# Altium PCB PCB1.PcbDoc
Units mil, origin at the board's own origin, x right, y up, seen from the top; angles counter-clockwise.
Board outline 2318.9 x 2507.87 mil, 2 copper layers (Top Layer, Bottom Layer); 19 components, 36 nets, 134 pads, 1 vias.
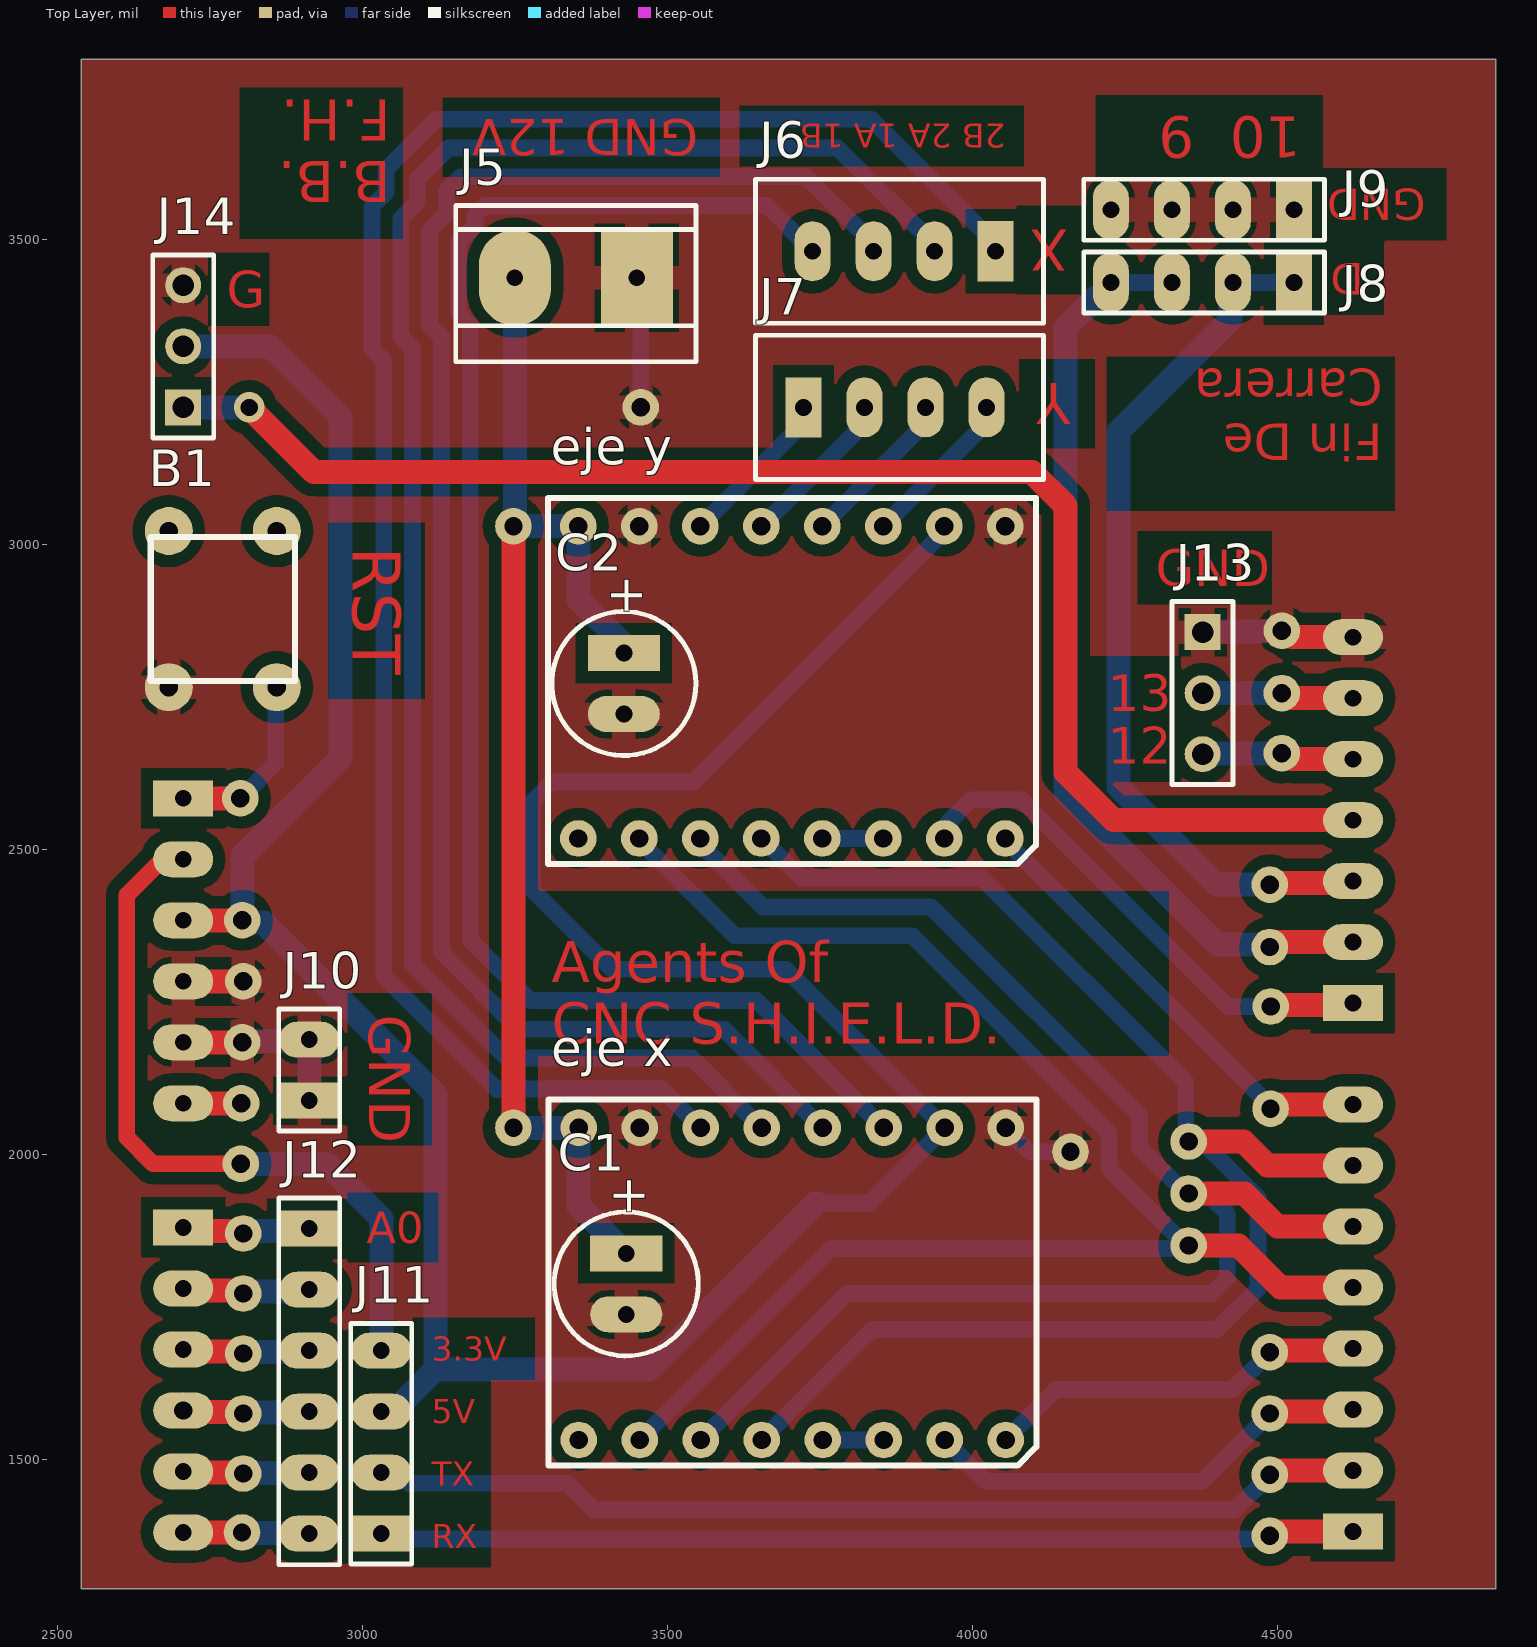
[diagram p0: Top Layer view]
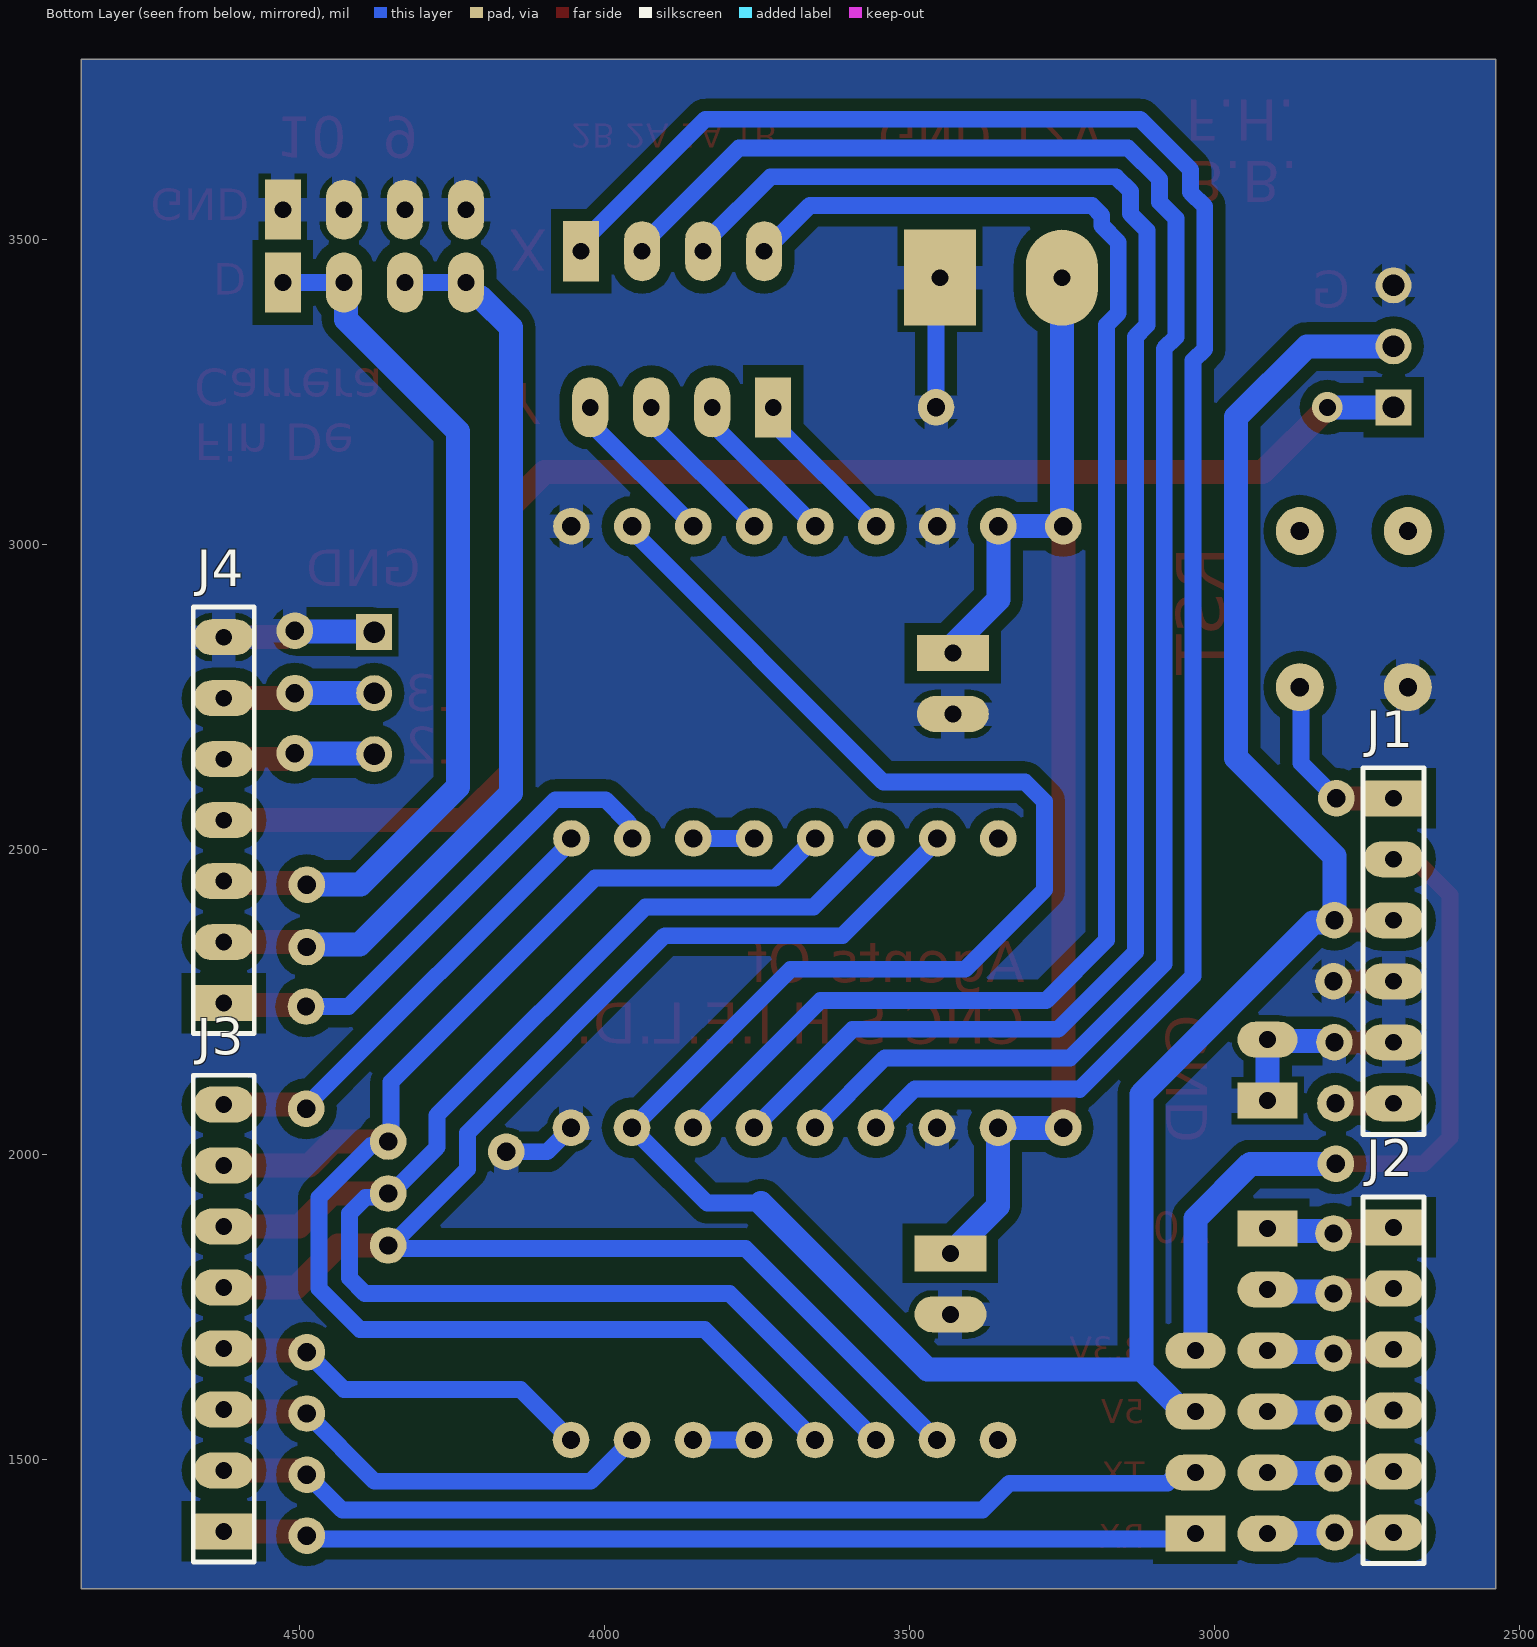
[diagram p1: Bottom Layer view, seen from below]

## Layer stack, top to bottom
Top Solder: solder mask 0.4, Solder Resist, Dk 3.5
Top Layer: signal copper 1.4
Dielectric 1: dielectric 12.6, FR-4, Dk 4.8
Bottom Layer: signal copper 1.4
Bottom Solder: solder mask 0.4, Solder Resist, Dk 3.5

## Board outline
2539.37,1287.4 2539.37,3795.28 4858.27,3795.28 4858.27,1287.4

## Design rules (kind name [scope] priority, off if disabled: settings)
Clearance [All] p1: gap=19.68 ignorepadtopadclearanceinfootprint=FALSE
PolygonConnect [All] p1: connectstyle=Relief reliefconductorwidth=39.37 reliefentries=4 polygonreliefangle="90 Angle" airgapwidth=10
RoutingVias [All] p1: holewidth=28 width=50 viastyle="Through Hole" minholewidth=28 minwidth=50 maxholewidth=28 maxwidth=50
SolderMaskExpansion [All] p1: expansion=4 istentingtop=FALSE
Width [All] p1: maxlimit=39.37 minlimit=10 preferedwidth=39.37
30 further rules are at their usual default settings.

## Classes and differential pairs
component class Sheet1: B1 C1 C2 "eje x" "eje y" J1 J2 J3 J4 J5 J6 J7 J8 J9 J10 J11 J12 J14

## Components (designator, comment, footprint, x,y, rotation, side; value= is the part's Value field where it differs from the comment)
B1 "Pulsador 4 patas" Pulsador4patas 2771.65,2893.7 r270 top
C1 "Cap 100uF" "Cap 100uF 50V" 3433.07,1787.4 r90 top
C2 "Cap 100uF" "Cap 100uF 50V" 3429.13,2771.65 r90 top
"eje x" "driver A4988" "DRIVER A4988" 3705.32,1789.37 r90 top
"eje y" "driver A4988" "DRIVER A4988" 3704.72,2775.59 r90 top
J1 "1" HDR1X6 2706.69,2583.46 r270 bottom
J2 "1" HDR1X6 2706.69,1879.92 r270 bottom
J3 "1" HDR1X8 4624.41,1381.5 r90 bottom
J4 "1" HDR1X7 4624.41,2247.64 r90 bottom
J5 "VMOT" Bornerax2 3350.39,3437.01 r180 top
J6 "Header 4 blanquito" "HDR1X4 blanquito" 4077.95,3480.31 r180 top
J7 "Header 4 blanquito" "HDR1X4 blanquito" 3684.25,3224.41 r0 top
J8 "FIN DE CARRERA" HDR1X4 4527.56,3429.13 r180 top
J9 "GND" HDR1X4 4527.56,3548.43 r180 top
J10 "GND" HDR1X2 2913.39,2137.8 r90 top
J11 "Header 4" HDR1X4 3031.5,1377.95 r90 top
J12 "ANALOGICOS" HDR1X6 2913.39,1877.95 r270 top
J13 "Header 3" HDR1X3 4377.95,2855.91 r270 top
J14 "Header 3" HDR1X3 2706.69,3224.41 r90 top

## Footprints (in the part's own frame and the unit in brackets; to place one, negate y for a bottom-side part, rotate by r counter-clockwise, add the part's x,y. Pads: shape width x height; smd on the part's side, far side on the other; paste and mask are expansions set on the pad)
Bornerax2 [mm] "Connector; Header; 2 Position"
  rect 3x4 hole 0.7: 1(-2.54,0)
  oval 3x4 hole 0.7: 2(2.54,0)
  silkscreen extent -5,-3 5,3.5
"Cap 100uF 50V" [mm] "Polarized Capacitor (Radial); 2 Leads"
  rect 1.5x3 hole 0.7: 1(1.27,0)
  oval 1.5x3 hole 0.7: 2(-1.27,0)
  silkscreen extent -3,-3 3,3
"DRIVER A4988" [mil]
  round 60 hole 30: 0(253.94,350.2) 1(253.94,250.2) 2(253.94,150.2) 3(253.94,50.2) 4(253.94,-49.8) 5(253.94,-149.8) 6(253.94,-249.8) 7(253.94,-349.8) 8(-257.87,350.2) 9(-257.87,250.2) 10(-257.87,150.2) 11(-257.87,50.2) 12(-257.87,-49.8) 13(-257.87,-149.8) 14(-257.87,-249.8) 15(-257.87,-349.8)
  silkscreen extent -300,-400 300,400
HDR1X2 [mm] "Connector; Header; 2 Position"
  rect 1.5x2.5 hole 0.7: 1(-1.27,0)
  oval 1.5x2.5 hole 0.7: 2(1.27,0)
  silkscreen extent -2.54,-1.27 2.54,1.27
HDR1X3 [mm] "Connector; Header; 3 Position"
  rect 1.5x1.5 hole 0.9: 1(0,0)
  round 1.5 hole 0.9: 2(2.54,0) 3(5.08,0)
  silkscreen extent -1.27,-1.27 6.35,1.27
HDR1X4 [mm] "Connector; Header; 9 Position"
  rect 1.5x2.5 hole 0.7: 1(0,0)
  oval 1.5x2.5 hole 0.7: 2(2.54,0) 3(5.08,0) 4(7.62,0)
  silkscreen extent -1.27,-1.27 8.75,1.27
"HDR1X4 blanquito" [mm] "Connector; Header; 9 Position"
  rect 1.5x2.5 hole 0.7: 1(1,0)
  oval 1.5x2.5 hole 0.7: 2(3.54,0) 3(6.08,0) 4(8.62,0)
  silkscreen extent -1,-3 11,3
HDR1X6 [mm] "Connector; Header; 9 Position"
  rect 1.5x2.5 hole 0.7: 1(0,0)
  oval 1.5x2.5 hole 0.7: 2(2.54,0) 3(5.08,0) 4(7.62,0) 5(10.16,0) 6(12.7,0)
  silkscreen extent -1.27,-1.27 14,1.27
HDR1X7 [mm] "Connector; Header; 9 Position"
  rect 1.5x2.5 hole 0.7: 1(0,0)
  oval 1.5x2.5 hole 0.7: 2(2.54,0) 3(5.08,0) 4(7.62,0) 5(10.16,0) 6(12.7,0) 7(15.24,0)
  silkscreen extent -1.27,-1.27 16.5,1.27
HDR1X8 [mm] "Connector; Header; 9 Position"
  rect 1.5x2.5 hole 0.7: 1(0,0)
  oval 1.5x2.5 hole 0.7: 2(2.54,0) 3(5.08,0) 4(7.62,0) 5(10.16,0) 6(12.7,0) 7(15.24,0) 8(17.78,0)
  silkscreen extent -1.27,-1.27 19,1.27
Pulsador4patas [mm]
  round 2 hole 0.762: 0(-3.25,2.25) 1(3.25,2.25) 2(3.25,-2.25) 3(-3.25,-2.25)
  silkscreen extent -3,-3 3,3

## Part data
C1 C2: library part "Cap 100uF 50V", "Polarized Capacitor (Radial)", LatestRevisionDate=17-Jul-2002, LatestRevisionNote="Re-released for DXP Platform.", PackageDescription="Polarized Capacitor (Radial); 2 Leads", PackageReference=RB7.6-15, Published=8-Jun-2000, Publisher="Altium Limited"
J1 J2 J12: library part "header X6"
J3: library part "header X8"
J4: library part "header X7"
J5: library part Bornerax2, "Header, 2-Pin", LatestRevisionDate=17-Jul-2002, LatestRevisionNote="Re-released for DXP Platform.", Publisher="Altium Limited"
J6 J7: library part "Header 4_1", "Header, 2-Pin", LatestRevisionDate=17-Jul-2002, LatestRevisionNote="Re-released for DXP Platform.", Publisher="Altium Limited"
J8 J9: library part "Header 4", "Header, 2-Pin", LatestRevisionDate=17-Jul-2002, LatestRevisionNote="Re-released for DXP Platform.", Publisher="Altium Limited"
J10: library part "Header 2", "Header, 2-Pin", LatestRevisionDate=17-Jul-2002, LatestRevisionNote="Re-released for DXP Platform.", Publisher="Altium Limited"
J11: "Header, 2-Pin", LatestRevisionDate=17-Jul-2002, LatestRevisionNote="Re-released for DXP Platform.", Publisher="Altium Limited"
J13 J14: "Header, 3-Pin", LatestRevisionDate=17-Jul-2002, LatestRevisionNote="Re-released for DXP Platform.", Publisher="Altium Limited"

## Free pads (board coordinates)
  round 60 hole 30: 5(2805.12,1673.23) 6(2805.12,1771.65) 7(2805.12,1870.08) 8(2805.12,1476.38) 10(2706.69,1579.92) 11(2805.12,1574.8) 12(2803.15,1379.92) 13(2800.39,2583.46) 14(2801.18,1984.25) 15(2803.54,2383.46) 16(2805.12,2283.46) 17(2803.54,2183.46) 18(2801.97,2083.46) 19(4488.19,1374.61) 20(4488.19,1474.41) 21(4488.19,1574.8) 22(4488.19,1675.2) 23(4355.01,1850.39) 24(4355.01,1935.53) 25(4355.01,2020.67) 26(4489.37,2074.61) 27(4489.57,2242.13) 28(4488.19,2339.57) 29(4488.19,2441.93) 31(4507.87,2657.48) 32(4507.87,2755.91) 33(4507.87,2858.27) 35(3248.03,2043.31) 36(3248.03,3029.53) 37(4161.42,2003.94) 38(3456.69,3224.41)

## Via types
v1: diameter 50, hole 28, Top Layer to Bottom Layer, 1 vias

## Nets (pads, with @x,y where several pads share a name; then routed paths per layer and width w, separated by ;. In a path a pad name is that pad's centre, name@x,y a point inside that pad or via, vN(x,y) a via of type N, cw(c..) or ccw(c..) an arc to the next point about the centre after c; other vN are vias at no path point)
1A_X: "eje x.4" J6.3 | length 2756.3
  Bottom Layer w27.56: 3755.12,2043.31 3593.7,2204.72 3256.47,2204.72 3129.92,2331.28 3129.92,3340.14 3110.63,3359.43 3110.63,3514.58 3137.8,3541.75 3137.8,3578.74 3161.42,3602.36 3728.35,3602.36 J6.3@3830.71,3500
1A_Y: "eje y.4" J7.3 | length 253
  Bottom Layer w27.56: 3765.75,3029.53 3754.53,3029.53 J7.3@3925.49,3200.49
1B_X: "eje x.5" J6.4 | length 2603.9
  Bottom Layer w27.56: J6.4 3663.78,3555.12 3201.18,3555.12 3185.04,3538.97 3185.04,3522.18 3157.87,3495.02 3157.87,3379 3177.17,3359.71 3177.17,2350.84 3276.04,2251.97 3646.46,2251.97 3855.12,2043.31
1B_Y: "eje y.5" J7.4 | length 258.8
  Bottom Layer w27.56: 3864.17,3029.53 3854.53,3029.53 4023.62,3198.62 J7.4@4023.62,3208.66
2A_X: "eje x.3" J6.2 | length 2931.9
  Bottom Layer w27.56: 3655.12,2043.31 3540.95,2157.48 3236.9,2157.48 3082.68,2311.71 3082.68,3320.57 3063.39,3339.86 3063.39,3534.15 3090.55,3561.32 3090.55,3598.43 3141.73,3649.61 3779.53,3649.61 J6.2@3943.7,3485.43
2A_Y: "eje y.3" J7.2 | length 232
  Bottom Layer w27.56: 3654.53,3029.53 3655.51,3029.53 J7.2@3818.9,3192.91
2B_X: "eje x.2" J6.1 | length 3053.9
  Bottom Layer w27.56: 3555.12,2043.31 3491.65,2106.77 3221.74,2106.77 3221.27,2106.3 3035.43,2292.14 3035.43,3301 3016.14,3320.29 3016.14,3553.72 3039.37,3576.95 3039.37,3614.06 3122.16,3696.85 3834.65,3696.85 J6.1@4019.68,3511.81
2B_Y: "eje y.2" J7.1 | length 258.3
  Bottom Layer w27.56: 3557.09,3029.53 3554.53,3029.53 3720.47,3195.47 J7.1@3720.47,3216.54
3.3V: J1.2 J11.4 pad.14 | length 1203.1
  Top Layer w27.56: J1.2 2672.44,2483.46 2614.17,2425.2 2614.17,2027.56 2657.48,1984.25 pad.14
  Bottom Layer w39.37: pad.14 2941.5,1984.25 3031.5,1894.26 J11.4
5V: "eje x.6" "eje y.6" J1.3 J11.3 J14.2 pad.15 | length 5146.5
  Top Layer w39.37: J1.3 pad.15
  Bottom Layer w27.56: 3743.75,1920.12 3831.94,1920.12 3955.12,2043.31 3695.28,2303.15 3409.45,2303.15 3279.13,2433.47 3279.13,2578.34 3311.02,2610.24 3543.31,2610.24 3954.53,3021.46 3954.53,3029.53
  Bottom Layer w39.37: J14.2 2848.82,3324.41 2964.57,3208.66 2964.57,2649.53 2803.54,2488.51 pad.15 2807.49,2379.52 2838.78,2379.52 3120.08,2098.22 3120.08,1646.85 ; J11.3 3051.18,1577.95 3120.08,1646.85 ; 3743.75,1920.12 3470.47,1646.85 3120.08,1646.85
12V: "eje x.0" "eje y.0" C1.1 C2.1 J5.2 pad.35 pad.36 | length 2087.6
  Top Layer w39.37: pad.35 pad.36
  Bottom Layer w27.56: pad.36 pad.36@3250.39,3031.89 ; C2.1 C2.1@3429.13,2834.65
  Bottom Layer w39.37: pad.35 3355.12,2043.31 3355.12,1915.35 C1.1 ; pad.36 pad.36@3250.39,3029.53 ; J5.2 3250.39,3031.89 pad.36@3250.39,3029.53 ; C2.1@3429.13,2834.65 3354.53,2909.25 3354.53,3029.53 pad.36@3250.39,3029.53
A0: J2.1 J12.1 pad.7 | length 214
  Top Layer w39.37: J2.1 2712.59,1874.03 2801.17,1874.03 pad.7
  Bottom Layer w39.37: pad.7 2809.06,1874.02 2909.45,1874.02 J12.1
A1: J2.2 J12.2 pad.6 | length 224.4
  Top Layer w27.56: pad.6@2796.85,1779.92 pad.6
  Top Layer w39.37: J2.2 2710.46,1776.15 2795.03,1776.15 2799.54,1771.65 pad.6
  Bottom Layer w39.37: pad.6 2808.27,1774.8 2910.24,1774.8 J12.2
A2: J2.3 J12.3 pad.5 | length 211.4
  Top Layer w39.37: J2.3 2710.04,1676.57 2801.77,1676.57 pad.5
  Bottom Layer w39.37: pad.5 2807.48,1675.59 2911.02,1675.59 J12.3
A3: J2.4 J12.4 pad.10 pad.11 | length 210.1
  Top Layer w39.37: pad.10 2709.25,1577.36 2802.56,1577.36 pad.11
  Bottom Layer w39.37: pad.11 2806.69,1576.38 2911.81,1576.38 J12.4
A4: J2.5 J12.5 pad.8 | length 208.8
  Top Layer w39.37: J2.5 2708.46,1478.15 2803.35,1478.15 pad.8
  Bottom Layer w39.37: pad.8 2805.91,1477.17 2912.6,1477.17 J12.5
A5: J2.6 J12.6 pad.12 | length 207.5
  Top Layer w39.37: J2.6 pad.12
  Bottom Layer w39.37: pad.12 2804.13,1378.94 2912.4,1378.94 J12.6
D0: J3.1 J11.1 pad.19 | length 1611.3
  Top Layer w27.56: pad.19 pad.19@4491.63,1378.05 ; J3.1@4620.96,1378.05 J3.1
  Top Layer w39.37: pad.19 4493.77,1374.61 4500.66,1381.5 J3.1
  Bottom Layer w27.56: J11.1 3040.16,1369.29 4482.87,1369.29 pad.19
D1: J3.2 J11.2 pad.20 | length 1655.3
  Top Layer w27.56: pad.20 pad.20@4491.73,1477.95 ; J3.2@4620.87,1477.95 J3.2
  Top Layer w39.37: pad.20 4493.77,1474.41 4500.86,1481.5 J3.2
  Bottom Layer w27.56: J11.2 3059.7,1477.95 3077.03,1460.63 3336.23,1460.63 3380.33,1416.54 4430.32,1416.54 pad.20
D2: "eje x.14" J3.3 pad.21 | length 746.1
  Top Layer w39.37: pad.21 4491.54,1578.15 4621.06,1578.15 J3.3
  Bottom Layer w27.56: 3955.12,1531.5 4022.83,1463.78 4377.17,1463.78 pad.21
D3: "eje x.15" J3.4 pad.22 | length 631.4
  Top Layer w39.37: pad.22 4491.34,1678.35 4621.26,1678.35 J3.4
  Bottom Layer w27.56: 4055.12,1531.5 4137.8,1614.17 4427.17,1614.17 pad.22
D4: "eje x.9" "eje y.9" J3.5 pad.23 | length 2510.7
  Top Layer w39.37: pad.23 4437.01,1850.39 4505.91,1781.5 J3.5
  Bottom Layer w27.56: 3455.12,1531.5 3769.09,1845.47 pad.23@4350.39,1845.47 ; 3470.47,2498.03 3610.24,2358.27 3901.57,2358.27 4224.88,2034.96 4224.88,1975.91 4350.39,1850.39 pad.23
D5: "eje x.10" "eje y.10" J3.6 pad.24 | length 2523.2
  Top Layer w39.37: pad.24 4446.82,1935.53 4500.86,1881.5 J3.6
  Bottom Layer w27.56: 3554.53,2517.72 3554.53,2508.47 3657.48,2405.51 3933.07,2405.51 4274.69,2063.89 4274.69,2011.24 4350.39,1935.53 pad.24 ; 3555.12,1531.5 3795.28,1771.65 4393.31,1771.65 4418.47,1796.82 4418.47,1902.89 4392.04,1929.32 pad.24@4355.2,1929.32
D6: "eje x.11" "eje y.11" J3.7 pad.25 | length 2459.3
  Top Layer w27.56: J3.7@4623.13,1982.78 J3.7
  Top Layer w39.37: pad.25 4445.2,2020.67 4484.38,1981.5 J3.7
  Bottom Layer w27.56: 3655.12,1531.5 3836.22,1712.6 4401.06,1712.6 4468.5,1780.04 4468.5,1929.13 4383.18,2014.46 4361.22,2014.46 pad.25 ; 3657.48,2515.75 3720.47,2452.76 4015.75,2452.76 4350.39,2118.11 pad.25@4350.39,2020.67
D7: "eje y.15" J3.8 pad.26 | length 786.6
  Top Layer w27.56: pad.26 pad.26@4492.81,2078.05 ; J3.8@4620.96,2078.05 J3.8
  Top Layer w39.37: pad.26 4494.95,2074.61 4501.84,2081.5 J3.8
  Bottom Layer w27.56: 4038.78,2517.72 4054.53,2517.72 4054.53,2513.58 4489.37,2078.74 pad.26
D8: "eje y.14" J4.1 pad.27 | length 850.3
  Top Layer w39.37: pad.27 4492.32,2244.88 4621.65,2244.88 J4.1
  Bottom Layer w27.56: 3954.53,2517.72 3960.73,2523.92 3960.73,2543.41 3998.5,2581.18 4080.81,2581.18 4123.96,2538.04 4419.87,2242.13 pad.27
D9: J4.2 J8.3 J8.4 pad.28 | length 1566.3
  Top Layer w27.56: pad.28 pad.28@4492.22,2343.6 ; J4.2@4620.37,2343.6 J4.2
  Top Layer w39.37: pad.28 4493.77,2339.57 4501.84,2347.64 J4.2
  Bottom Layer w27.56: J8.4 J8.3
  Bottom Layer w39.37: J8.4 4227.56,3414.78 4218.47,3405.68 4204.11,3405.68 4153.54,3355.12 4153.54,2592.13 4402.16,2343.51 4484.24,2343.51 pad.28
D10: J4.3 J8.1 J8.2 pad.29 | length 1457.5
  Top Layer w39.37: pad.29 4491.04,2444.78 4621.56,2444.78 J4.3
  Bottom Layer w27.56: J8.2 J8.1
  Bottom Layer w39.37: J8.2 4423.79,3425.37 4423.79,3368.67 4240.16,3185.04 4240.16,2602.36 4400.59,2441.93 pad.29
D11: J4.4 J14.1 | length 2454
  Top Layer w39.37: v1(2814.96,3224.41) 2921.26,3118.11 4098.43,3118.11 4153.54,3062.99 4153.54,2625.98 4231.89,2547.64 J4.4
  Bottom Layer w39.37: J14.1 v1(2814.96,3224.41)
D12: J4.5 J13.3 pad.31 | length 270.7
  Top Layer w27.56: pad.31 pad.31@4512.8,2652.56 ; J4.5@4619.49,2652.56 J4.5
  Top Layer w39.37: pad.31 4513.46,2657.48 4523.3,2647.64 J4.5
  Bottom Layer w39.37: J13.3 4378.74,2656.69 4507.09,2656.69 pad.31 pad.31@4502.29,2657.48
D13: J4.6 J13.2 pad.32 | length 267.7
  Top Layer w27.56: pad.32 pad.32@4512.01,2751.77 ; J4.6@4620.28,2751.77 J4.6
  Top Layer w39.37: pad.32 4513.46,2755.91 4521.72,2747.64 J4.6
  Bottom Layer w27.56: pad.32@4503.54,2751.57 pad.32
  Bottom Layer w39.37: J13.2 pad.32
GND: "eje x.1" "eje x.7" "eje y.1" "eje y.7" B1.2 C1.2 C2.2 J1.4 J1.5 J4.7 J5.1 J9.1 J9.2 J9.3 J9.4 J10.1 J10.2 J13.1 J14.3 pad.16 pad.17 pad.33 pad.37 pad.38 | length 1013.3
  Top Layer w27.56: pad.33 pad.33@4513.19,2852.95 ; J4.7@4619.09,2852.95 J4.7
  Top Layer w39.37: J1.5 pad.17 ; J1.4 pad.16 ; pad.33 4513.46,2858.27 4524.09,2847.64 J4.7
  Bottom Layer w27.56: C1.2@3431.89,1736.22 C1.2 ; J5.1 3456.69,3430.71 pad.38 ; 4055.12,2043.31 4094.49,2003.94 pad.37
  Bottom Layer w39.37: pad.17 2805.71,2185.63 2911.22,2185.63 J10.2 J10.1 ; J13.1 4379.13,2857.09 4506.69,2857.09 pad.33
"Neteje x_12": "eje x.12" "eje x.13" | length 100
  Bottom Layer w27.56: 3755.12,1531.5 3855.12,1531.5
"Neteje y_12": "eje y.12" "eje y.13" | length 100
  Bottom Layer w27.56: 3754.53,2517.72 3854.53,2517.72
RST: B1.1 J1.1 pad.13 | length 302.9
  Top Layer w39.37: J1.1 pad.13
  Bottom Layer w27.56: pad.13 2858.27,2641.34 2858.27,2751.97 2866.14,2759.84 B1.1@2870.08,2763.78
VIN: J1.6 pad.18 | length 95.3
  Top Layer w39.37: J1.6 pad.18
pads on no net: "eje x.8" "eje y.8" B1.0 B1.3

## Polygon pours and split planes (outlines as drawn)
GND on Bottom Layer "GND_L02_P000" (solid, remove dead copper, pour order 0): 4858.27,3795.28 4858.27,1287.4 2539.37,1287.4 2539.37,3795.28
GND on Top Layer "GND_L01_P001" (solid, remove dead copper, pour order 1): 2539.37,3795.28 4858.27,3795.28 4858.27,1287.4 2539.37,1287.4

## Other copper
Top Layer:
  text "B.B. / F.H." at 3047.24,3728.35 h66.93 r180
  text "10  9" at 4539.37,3700.79 h66.93 r180
  text "GND 12V" at 3551.18,3696.85 h59.06 r180
  text "2B 2A 1A 1B" at 4055.12,3688.98 h39.37 r180
  text "GND" at 4744.06,3582.68 h51.18 r180
  text "X" at 4157.48,3515.75 h66.93 r180
  text "D" at 4641.73,3460.63 h51.18 r180
  text "G" at 2777.72,3387.95 h60
  text "Fin De / Carrera" at 4673.23,3287.4 h60 r180
  text "Y" at 4161.42,3263.78 h66.93 r180
  text "RST" at 2984.25,2996.06 h78.74 r270
  text "GND" at 4301.34,2931.26 h60
  text "13" at 4222.6,2726.54 h60
  text "12" at 4222.6,2639.92 h60
  text "GND" at 3011.81,2228.35 h66.93 r270
  text "Agents Of / CNC S.H.I.E.L.D." at 3311.02,2181.1 h66.93
  text "A0" at 3007.87,1854.33 h51.18
  text "3.3V" at 3114.17,1661.42 h39.37
  text "5V" at 3114.17,1559.06 h39.37
  text "TX" at 3114.17,1456.69 h39.37
  text "RX" at 3114.17,1354.33 h39.37

## Silkscreen, mask and mechanical layers (free items; w line width, h text height)
Mechanical 1:
  the board outline again, w10

## Text inside footprints (layer, text, board x,y; h text height)
C1: Top Overlay "+" at 3462.99,1897.64 h59.06 r90
C2: Top Overlay "+" at 3459.05,2881.89 h59.06 r90